# EAGLE board untitled (EAGLE 5.11)
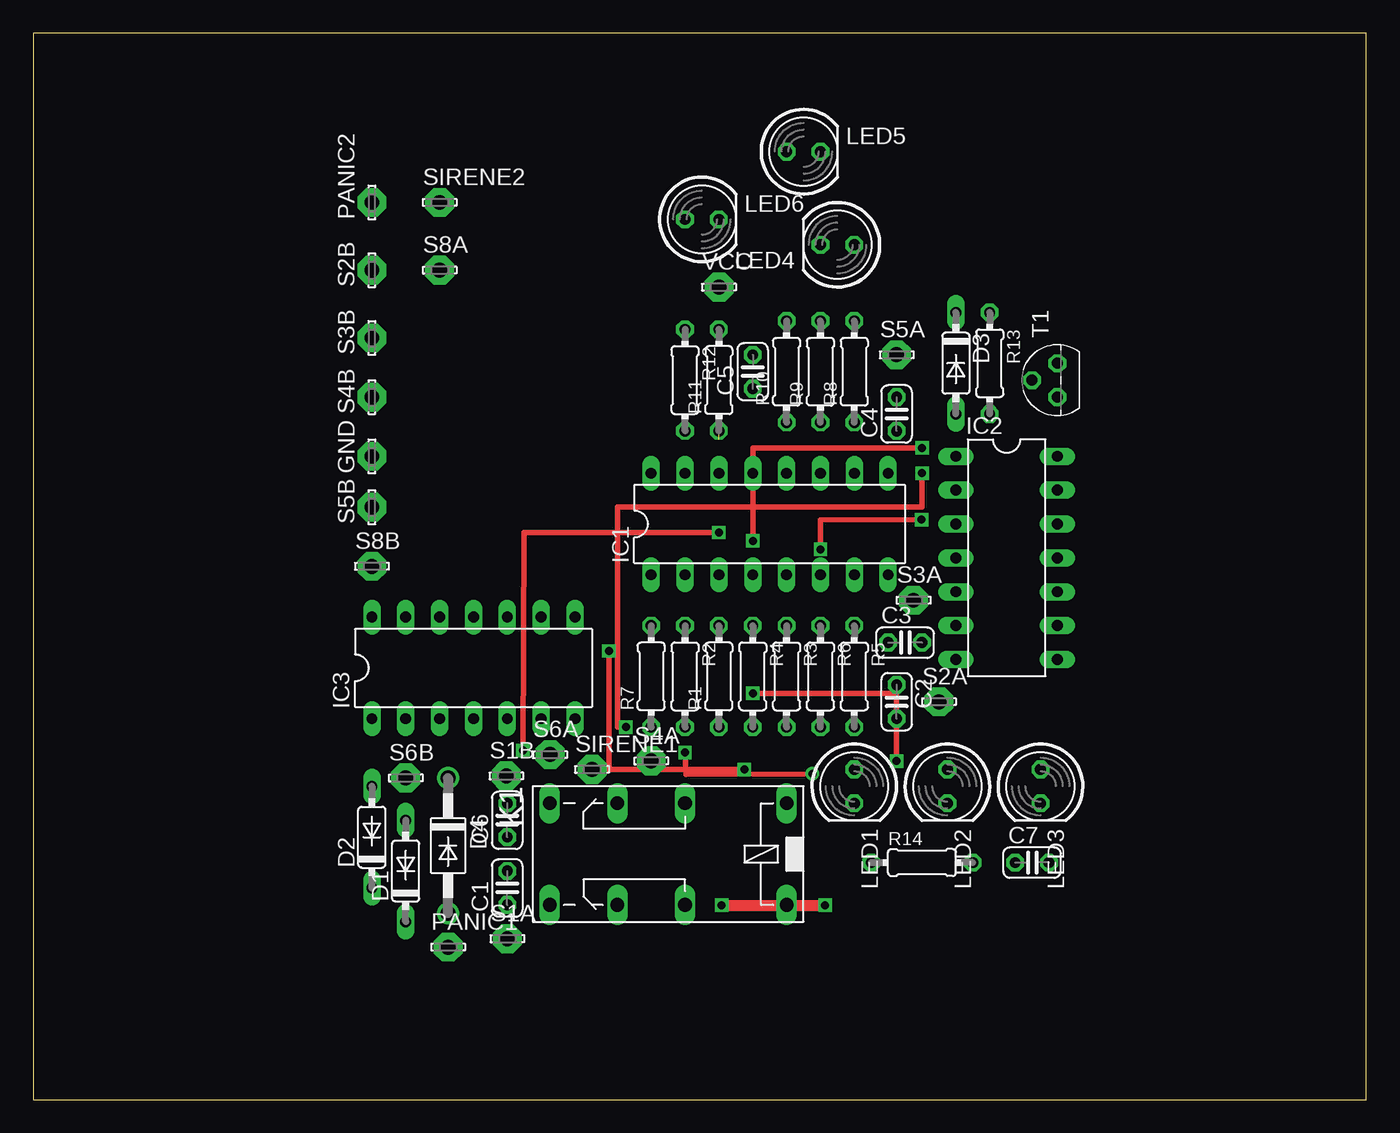
[diagram p0: board, top side]
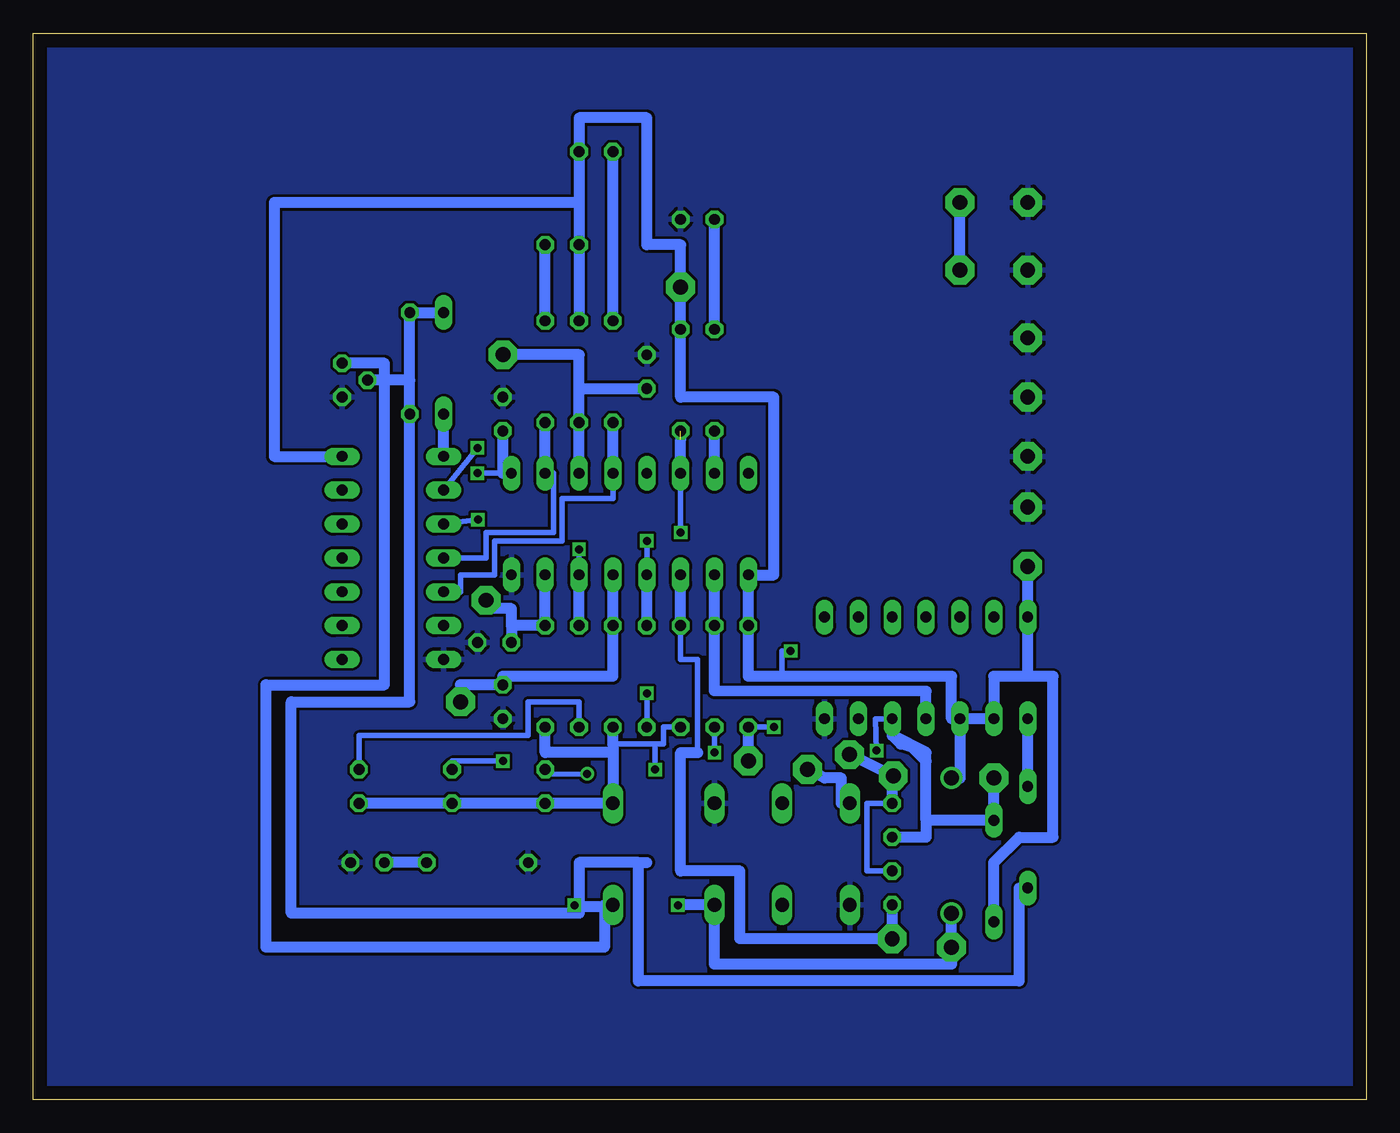
[diagram p1: board, bottom side, seen from below]

Size 100 x 80 mm. Coordinates in mm from the lower left corner, seen from the top.
Outline: 0,0 100,0 100,80 0,80 0,0
Copper layers (1*16): Top 0.035mm / dielectric 1.5mm / Bottom 0.035mm
Design rules "default": minimum track width 10mil, minimum drill 24mil, track to track 8mil, track to pad 8mil, pad to pad 8mil, via to via 8mil, smd to smd 8mil, copper to edge 40mil, drill to drill 8mil, minimum pad ring 10mil, minimum via ring 8mil, stop-mask expansion 4mil, vias tented up to drill 0mil, thermal gap 10mil

## Footprints (pad centres in the part's own frame; a part is rotated, then mirrored left to right if it is on the bottom)
C025-024X044 = drill 0.813 octagon: 1 -1.27,0; 2 1.27,0
DO35-7 = drill 0.813 long: A 3.81,0; C -3.81,0
DO41-10 = drill 1.118 round: A 5.08,0; C -5.08,0
LSP11 = drill 1.118 pad 2.159 octagon: MP 0,0
DIL16 = drill 0.813 long: 1 -8.89,-3.81; 2 -6.35,-3.81; 3 -3.81,-3.81; 4 -1.27,-3.81; 5 1.27,-3.81; 6 3.81,-3.81; 7 6.35,-3.81; 8 8.89,-3.81; 9 8.89,3.81; 10 6.35,3.81; 11 3.81,3.81; 12 1.27,3.81; 13 -1.27,3.81; 14 -3.81,3.81; 15 -6.35,3.81; 16 -8.89,3.81
DIL14 = drill 0.813 long: 1 -7.62,-3.81; 2 -5.08,-3.81; 3 -2.54,-3.81; 4 0,-3.81; 5 2.54,-3.81; 6 5.08,-3.81; 7 7.62,-3.81; 8 7.62,3.81; 9 5.08,3.81; 10 2.54,3.81; 11 0,3.81; 12 -2.54,3.81; 13 -5.08,3.81; 14 -7.62,3.81
351 = drill 1.016 long: 1 -3.81,-3.81; 16 -3.81,3.81; O1 8.89,-3.81; O2 8.89,3.81; P1 3.81,-3.81; P2 3.81,3.81; S1 13.97,-3.81; S2 13.97,3.81
LED5MM = drill 0.813 octagon: A -1.27,0; K 1.27,0
0204/7 = drill 0.813 octagon: 1 -3.81,0; 2 3.81,0
TO92 = drill 0.813 octagon: 1 1.27,0; 2 0,1.905; 3 -1.27,0

## Placement (x,y rotation side)
C1  100n  [C025-024X044]  35.56,15.88 90 top
C2  100n  [C025-024X044]  64.77,29.84 270 top
C3  100n  [C025-024X044]  65.41,34.29 0 top
C4  100n  [C025-024X044]  64.77,51.44 90 top
C5  100n  [C025-024X044]  53.98,54.61 90 top
C6  [C025-024X044]  35.56,20.95 90 top
C7  1uF  [C025-024X044]  74.93,17.78 0 top
D1  1N4148DO35-7  [DO35-7]  27.94,17.14 90 top
D2  1N4148DO35-7  [DO35-7]  25.4,19.68 90 top
D3  1N4148DO35-7  [DO35-7]  69.22,55.24 270 top
D4  1N4004  [DO41-10]  31.11,19.05 270 top
GND  LSP11  [LSP11]  25.4,48.26 90 top
IC1  4050N  [DIL16]  55.24,43.18 0 top
IC2  4072N  [DIL14]  73.03,40.64 270 top
IC3  4082N  [DIL14]  33.02,32.38 0 top
K1  351  [351]  52.7,18.41 180 top
LED1  [LED5MM]  61.59,23.5 270 top
LED2  [LED5MM]  68.58,23.5 270 top
LED3  [LED5MM]  75.56,23.5 270 top
LED4  [LED5MM]  60.33,64.14 180 top
LED5  [LED5MM]  57.78,71.12 0 top
LED6  [LED5MM]  50.16,66.04 0 top
PANIC1  LSP11  [LSP11]  31.11,11.43 0 top
PANIC2  LSP11  [LSP11]  25.4,67.31 90 top
R1  100k  [0204/7]  51.44,31.75 90 top
R2  1k  [0204/7]  48.9,31.75 270 top
R3  100k  [0204/7]  56.52,31.75 270 top
R4  1k  [0204/7]  53.98,31.75 270 top
R5  100k  [0204/7]  61.59,31.75 270 top
R6  1k  [0204/7]  59.05,31.75 270 top
R7  100k  [0204/7]  46.35,31.75 90 top
R8  1k  [0204/7]  61.59,54.61 90 top
R9  100k  [0204/7]  59.05,54.61 90 top
R10  1k  [0204/7]  56.52,54.61 90 top
R11  220k  [0204/7]  51.44,53.98 90 top
R12  1k  [0204/7]  48.9,53.98 270 top
R13  10k  [0204/7]  71.75,55.24 270 top
R14  100k  [0204/7]  66.67,17.78 0 top
S1A  LSP11  [LSP11]  35.56,12.06 0 top
S1B  LSP11  [LSP11]  35.48,24.28 0 top
S2A  LSP11  [LSP11]  67.94,29.84 0 top
S2B  LSP11  [LSP11]  25.4,62.23 90 top
S3A  LSP11  [LSP11]  66.04,37.47 0 top
S3B  LSP11  [LSP11]  25.4,57.15 90 top
S4A  LSP11  [LSP11]  46.35,25.4 0 top
S4B  LSP11  [LSP11]  25.4,52.7 90 top
S5A  LSP11  [LSP11]  64.77,55.88 0 top
S5B  LSP11  [LSP11]  25.4,44.45 90 top
S6A  LSP11  [LSP11]  38.76,25.88 0 top
S6B  LSP11  [LSP11]  27.94,24.13 0 top
S8A  LSP11  [LSP11]  30.48,62.23 0 top
S8B  LSP11  [LSP11]  25.4,40.01 0 top
SIRENE1  LSP11  [LSP11]  41.91,24.77 0 top
SIRENE2  LSP11  [LSP11]  30.48,67.31 0 top
T1  2N3904  [TO92]  76.83,53.98 90 top
VCC  LSP11  [LSP11]  51.44,60.96 0 top

## Library data of the parts
C1-C7 R1-R14 = rcl
D1-D4 = diode
GND PANIC1 PANIC2 S1A S1B S2A S2B S3A S3B S4A S4B S5A S5B S6A S6B S8A S8B SIRENE1 SIRENE2 VCC = solpad
IC1-IC3 = 40xx
K1 = relay; OC_FARNELL: unknown; OC_NEWARK: unknown
LED1-LED6 = led
T1 = transistor

## Nets
GND: C2.2 C3.2 C4.2 C5.2 C7.2 GND.MP IC1.8 IC2.7 IC3.7 K1.P1 K1.S2 LED6.K PANIC2.MP R14.1 S2B.MP S3B.MP S4B.MP S5B.MP T1.3
N$1: C1.1 IC1.3 R1.2 S1A.MP
N$2: D2.A IC3.1
N$4: LED1.A R2.2
N$5: IC1.2 IC3.4 R2.1
N$6: C2.1 IC1.5 R3.1 S2A.MP
N$7: C6.1 D1.A IC1.14 IC3.5 R11.1 S6B.MP
N$8: IC1.4 IC2.2 R4.1
N$9: LED2.A R4.2
N$10: R13.2 T1.2
N$11: C3.1 IC1.7 R5.1 S3A.MP
N$12: IC1.6 IC2.3 R6.1
N$13: LED3.A R6.2
N$14: D3.A IC2.1
N$15: C4.1 IC1.9 R7.1 S4A.MP
N$16: D2.C D3.C R13.1
N$17: LED4.A R8.2
N$18: IC1.10 IC2.4 R8.1
N$19: K1.S1 SIRENE1.MP
N$20: C5.1 IC1.11 R9.1 S5A.MP
N$21: S8A.MP SIRENE2.MP
N$22: C7.1 R14.2
N$23: LED5.A R10.2
N$24: IC1.12 IC2.5 R10.1
N$25: LED6.A R12.1
N$26: IC1.15 R12.2
N$27: C1.2 C6.2 S1B.MP S6A.MP
N$28: D4.A K1.16 K1.P2 PANIC1.MP T1.1
VCC: D1.C D4.C IC1.1 IC2.14 IC3.2 IC3.3 IC3.14 K1.1 LED1.K LED2.K LED3.K LED4.K LED5.K R1.1 R3.2 R5.2 R7.2 R9.2 R11.2 S8B.MP VCC.MP

## Tracks (layer width: path | path; a pad name or v marks a point on that pad's centre or on a via)
GND
  pour Bottom: 0.64,78.74 99.06,78.74 99.06,0.64 0.64,0.64
N$1
  Bottom 0.406: 50.16,26.04 50.16,33.02 51.44,33.02 R1.2
  Bottom 0.813: R1.2 IC1.3 | C1.1 S1A.MP 46.99,12.06 46.99,17.14 51.44,17.14 51.44,26.04 50.16,26.04
N$2
  Bottom 0.813: D2.A IC3.1
N$4  (via drill 0.6)
  Top 0.406: v58.45,24.43 48.97,24.38 v48.9,26.04
  Bottom 0.406: LED1.A 61.59,24.41 v58.45,24.43 | v48.9,26.04 R2.2
N$5
  Bottom 0.813: IC1.2 R2.1 48.9,30.66 33.02,30.63 IC3.4
N$6
  Bottom 0.813: IC1.5 R3.1 56.52,31.75 64.77,31.75 C2.1 67.94,31.11 S2A.MP
N$7  (via drill 0.6)  (1 unrouted)
  Top 0.406: v36.73,26.19 36.83,42.55 v51.44,42.55
  Bottom 0.406: IC3.5 36.83,28.57 v36.73,26.19 | v51.44,42.55 IC1.14
  Bottom 0.813: IC1.14 51.44,49.53 | 33.02,20.95 33.02,19.68 C6.1 | 33.02,26.04 34.92,26.67 | 33.02,20.95 33.02,25.4 | 34.92,26.67 34.29,26.67 33.02,25.4 | 34.92,26.67 35.56,27.3 | 35.56,27.3 IC3.5 | 33.02,26.04 35.56,27.3 | 33.02,25.4 33.02,26.04 | 33.02,20.95 D1.A S6B.MP
N$8  (via drill 0.6)
  Top 0.406: v66.67,48.9 53.98,48.9 v53.98,41.91
  Bottom 0.406: v66.67,48.9 IC2.2 | 53.98,38.73 v53.98,41.91
  Bottom 0.813: R4.1 53.98,38.73 IC1.4
N$9  (via drill 0.6)
  Top 0.406: v53.98,30.48 64.77,30.48 v64.77,25.4
  Bottom 0.406: R4.2 v53.98,30.48 | v64.77,25.4 68.58,25.4 LED2.A
N$10
  Bottom 0.813: R13.2 71.75,53.98 T1.2
N$11
  Bottom 0.813: IC1.7 R5.1 64.14,35.56 | 64.14,35.56 C3.1 | 64.14,35.56 64.14,36.83 66.04,36.83 S3A.MP
N$12  (via drill 0.6)
  Top 0.406: v59.05,41.27 59.05,43.48 v66.65,43.51
  Bottom 0.406: IC1.6 v59.05,41.27 | v66.65,43.51 IC2.3
  Bottom 0.813: R6.1 IC1.6
N$13
  Bottom 0.406: LED3.A 75.56,27.3 62.87,27.3 62.87,29.84 59.05,29.84 R6.2
N$14
  Bottom 0.813: IC2.1 D3.A
N$15  (via drill 0.6)
  Top 0.406: v44.45,27.94 43.81,27.94 43.81,44.45 66.67,44.45 v66.67,46.99
  Bottom 0.406: R7.1 v44.45,27.94 | v66.67,46.99 64.77,46.99
  Bottom 0.813: IC1.9 64.77,46.99 C4.1 | S4A.MP R7.1
N$16
  Bottom 0.813: D3.C R13.1 71.75,29.84 80.64,29.84 80.64,13.97 59.05,13.97 59.05,17.78 54.61,17.78 | D2.C 26.04,15.88 26.04,8.89 54.61,8.89 54.61,17.78 | 54.61,17.78 53.98,17.78
N$17
  Bottom 0.813: R8.2 LED4.A
N$18
  Bottom 0.406: IC1.10 60.96,46.99 60.96,42.55 66.04,42.55 66.04,40.64 IC2.4
  Bottom 0.813: IC1.10 R8.1
N$19
  Bottom 0.813: K1.S1 39.37,22.23 39.37,24.13 40.64,24.13 SIRENE1.MP
N$20
  Bottom 0.813: IC1.11 R9.1 59.05,53.34 | 59.05,53.34 C5.1 | 59.05,53.34 59.05,55.88 S5A.MP
N$21
  Bottom 0.813: S8A.MP SIRENE2.MP
N$22
  Bottom 0.813: R14.2 C7.1
N$23
  Bottom 0.813: R10.2 LED5.A
N$24
  Bottom 0.406: IC2.5 67.94,38.1 67.94,39.37 65.41,39.37 65.41,41.91 60.33,41.91 60.33,45.09 56.52,45.09 IC1.12
  Bottom 0.813: IC1.12 R10.1
N$25
  Bottom 0.813: R12.1 LED6.A
N$26
  Bottom 0.813: IC1.15 R12.2
N$27
  Bottom 0.406: C1.2 37.47,17.14 37.47,22.23 C6.2
  Bottom 0.813: S6A.MP S1B.MP 35.56,24.08 C6.2
N$28  (via drill 0.6)
  Top 0.813: v51.64,14.58 v59.41,14.58
  Bottom 0.406: 31.11,13.34 D4.A
  Bottom 0.813: 31.11,13.34 PANIC1.MP 31.11,10.16 48.9,10.16 K1.P2 51.64,14.61 v51.64,14.58 | T1.1 73.66,55.24 73.66,31.11 82.55,31.11 82.55,11.43 57.15,11.43 57.15,14.5 | K1.16 57.15,14.61 57.15,14.5 | v59.41,14.58 59.41,14.5 57.15,14.5
VCC  (via drill 0.6)
  Top 0.406: v53.34,24.77 43.18,24.77 v43.18,33.66
  Bottom 0.406: 53.34,26.67 56.52,26.67 | R1.1 52.7,27.94 52.7,26.67 53.34,26.67 | v53.34,24.77 53.34,26.67 | v43.18,33.66 43.81,33.66 43.81,31.75
  Bottom 0.813: S8B.MP IC3.14 25.4,31.75 | 59.05,67.31 LED5.K 59.05,73.66 53.98,73.66 53.98,64.14 51.44,64.14 R11.2 | 59.05,67.31 LED4.K R9.2 | R11.2 VCC.MP | 25.4,31.75 27.94,31.75 IC3.2 IC3.3 | IC3.3 30.48,24.13 D4.C | 59.05,67.31 81.92,67.31 81.92,48.26 IC2.14 | LED3.K LED2.K LED1.K K1.1 56.52,26.04 | 56.52,26.04 56.52,26.67 R3.2 | R5.2 61.59,26.04 56.52,26.04 | 25.4,31.75 23.5,31.75 23.5,19.68 26.04,19.68 27.94,17.78 D1.C | IC3.3 31.11,28.57 31.11,31.75 43.81,31.75 46.35,31.75 R7.2 IC1.1 44.45,39.37 44.45,52.7 51.44,52.7 R11.2